# Altium PCB DB.PcbDoc (part 1 of 3)
Units mm, origin at the board's own origin, x right, y up, seen from the top; angles counter-clockwise.
Board outline 248 x 160 mm, 2 copper layers (Top Layer, Bottom Layer), stack 1.571 mm thick; 227 components, 245 nets, 960 pads, 72 vias.
Unrouted connection lines stored in the file: 1.
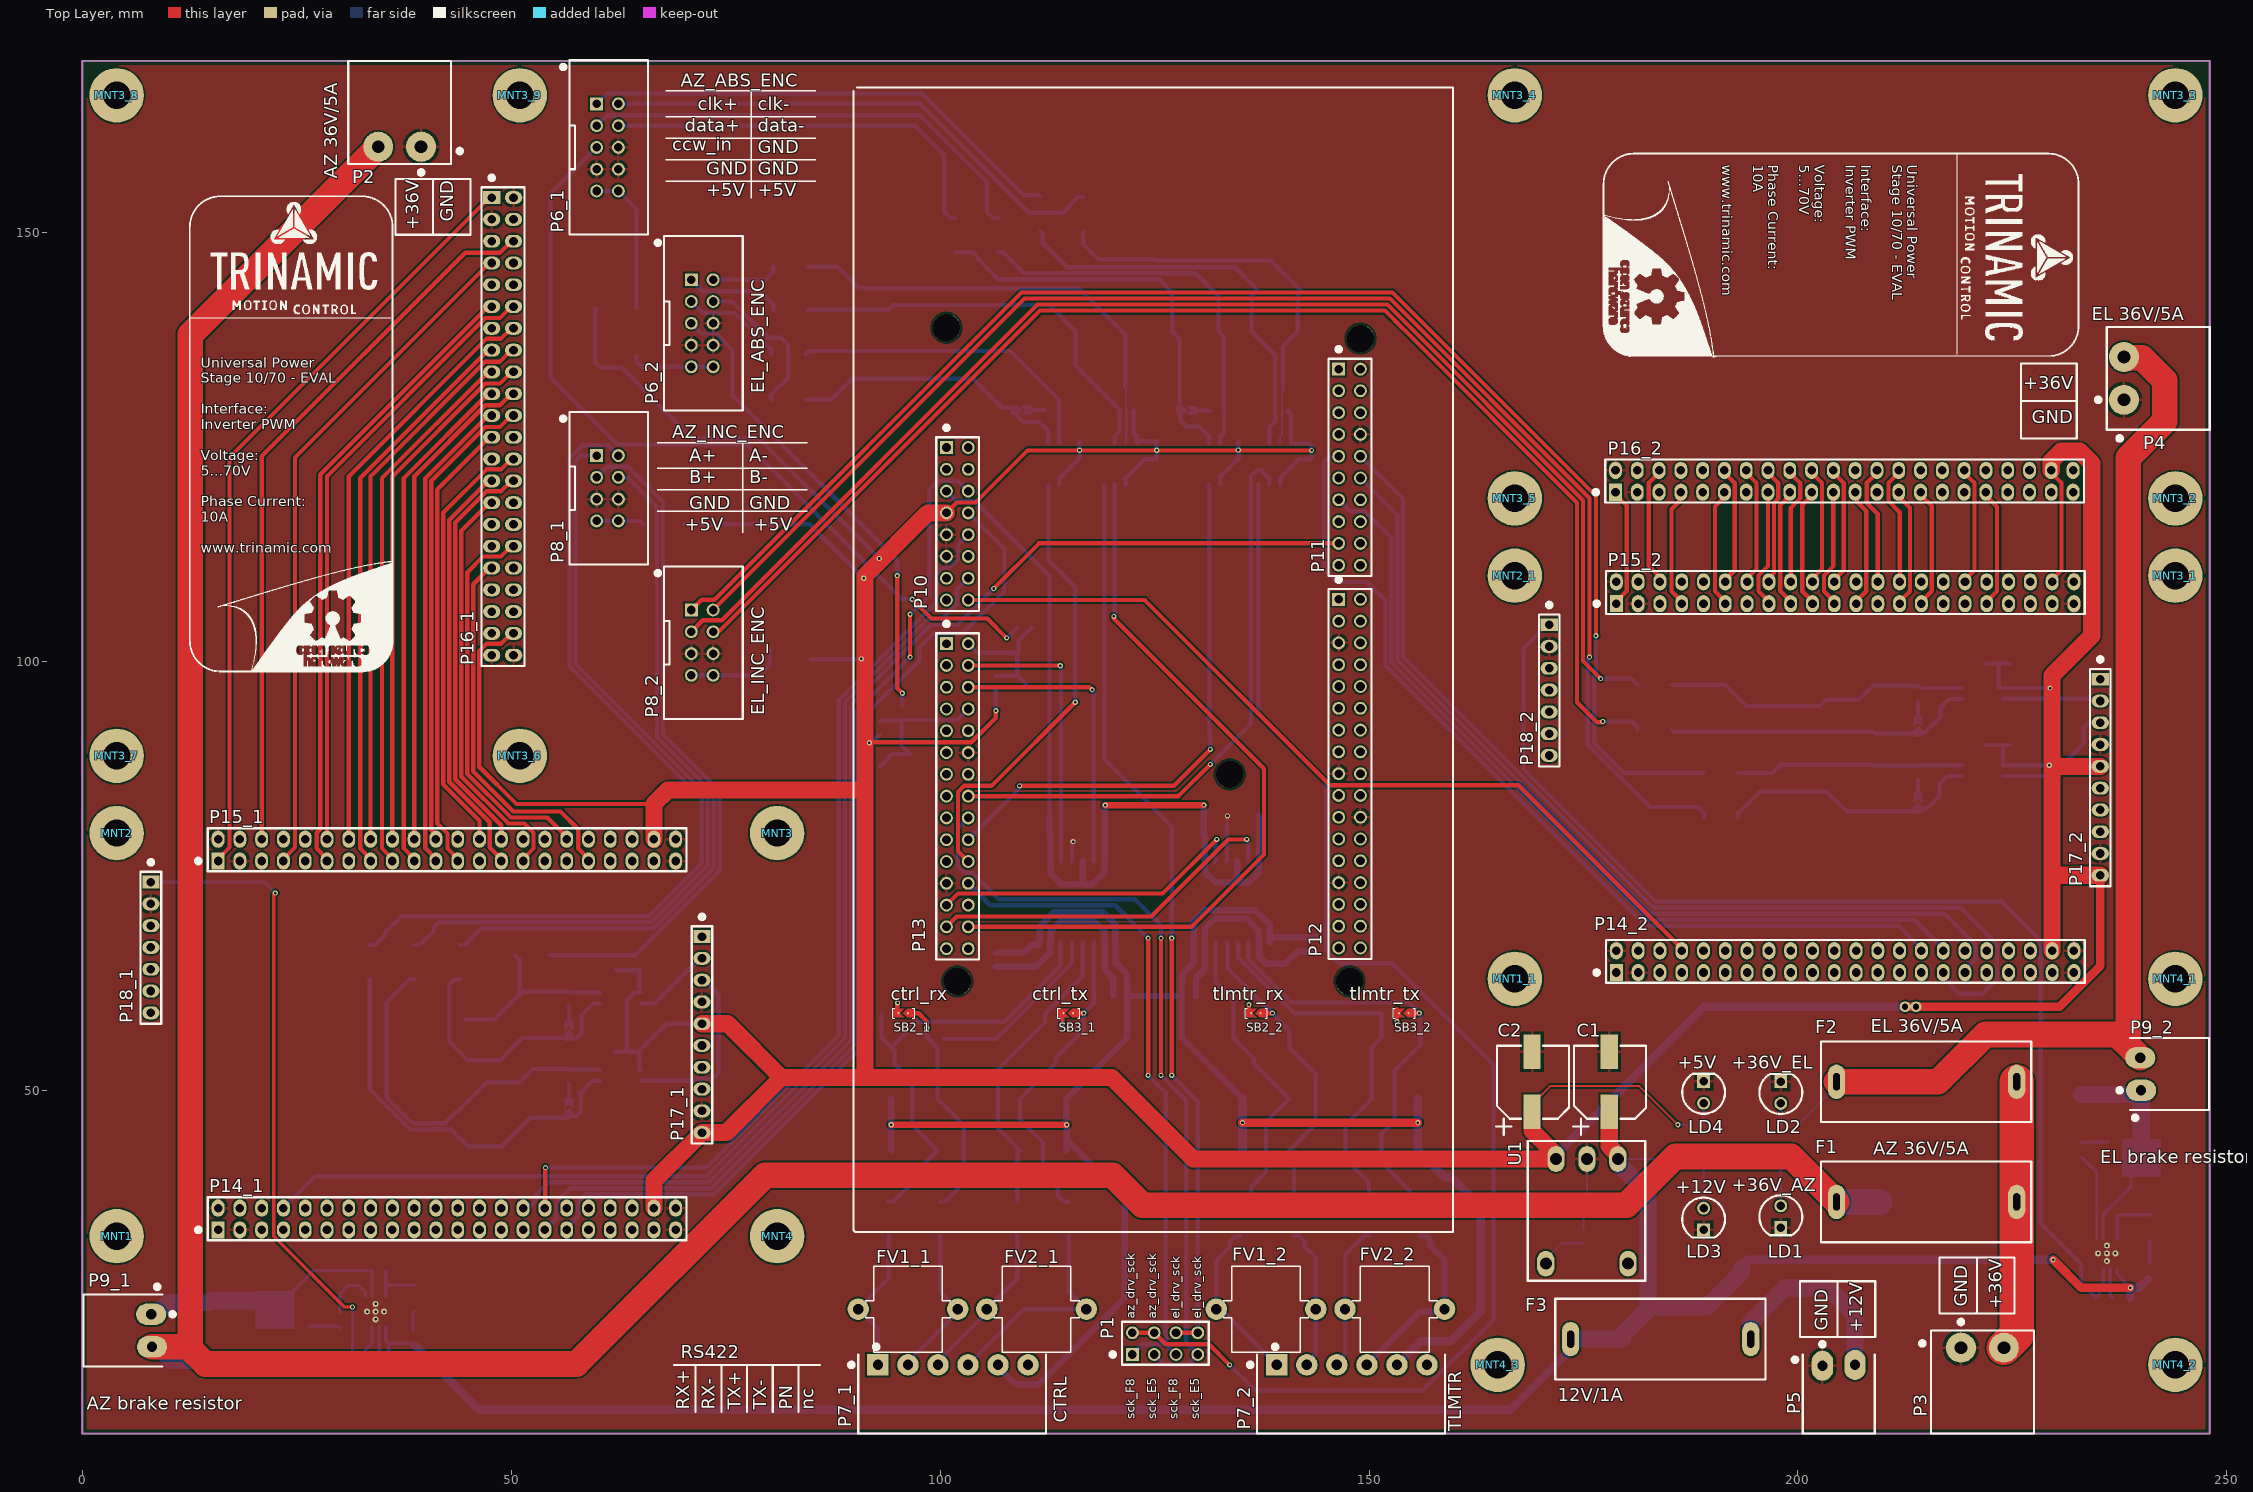
[diagram p0: Top Layer view]
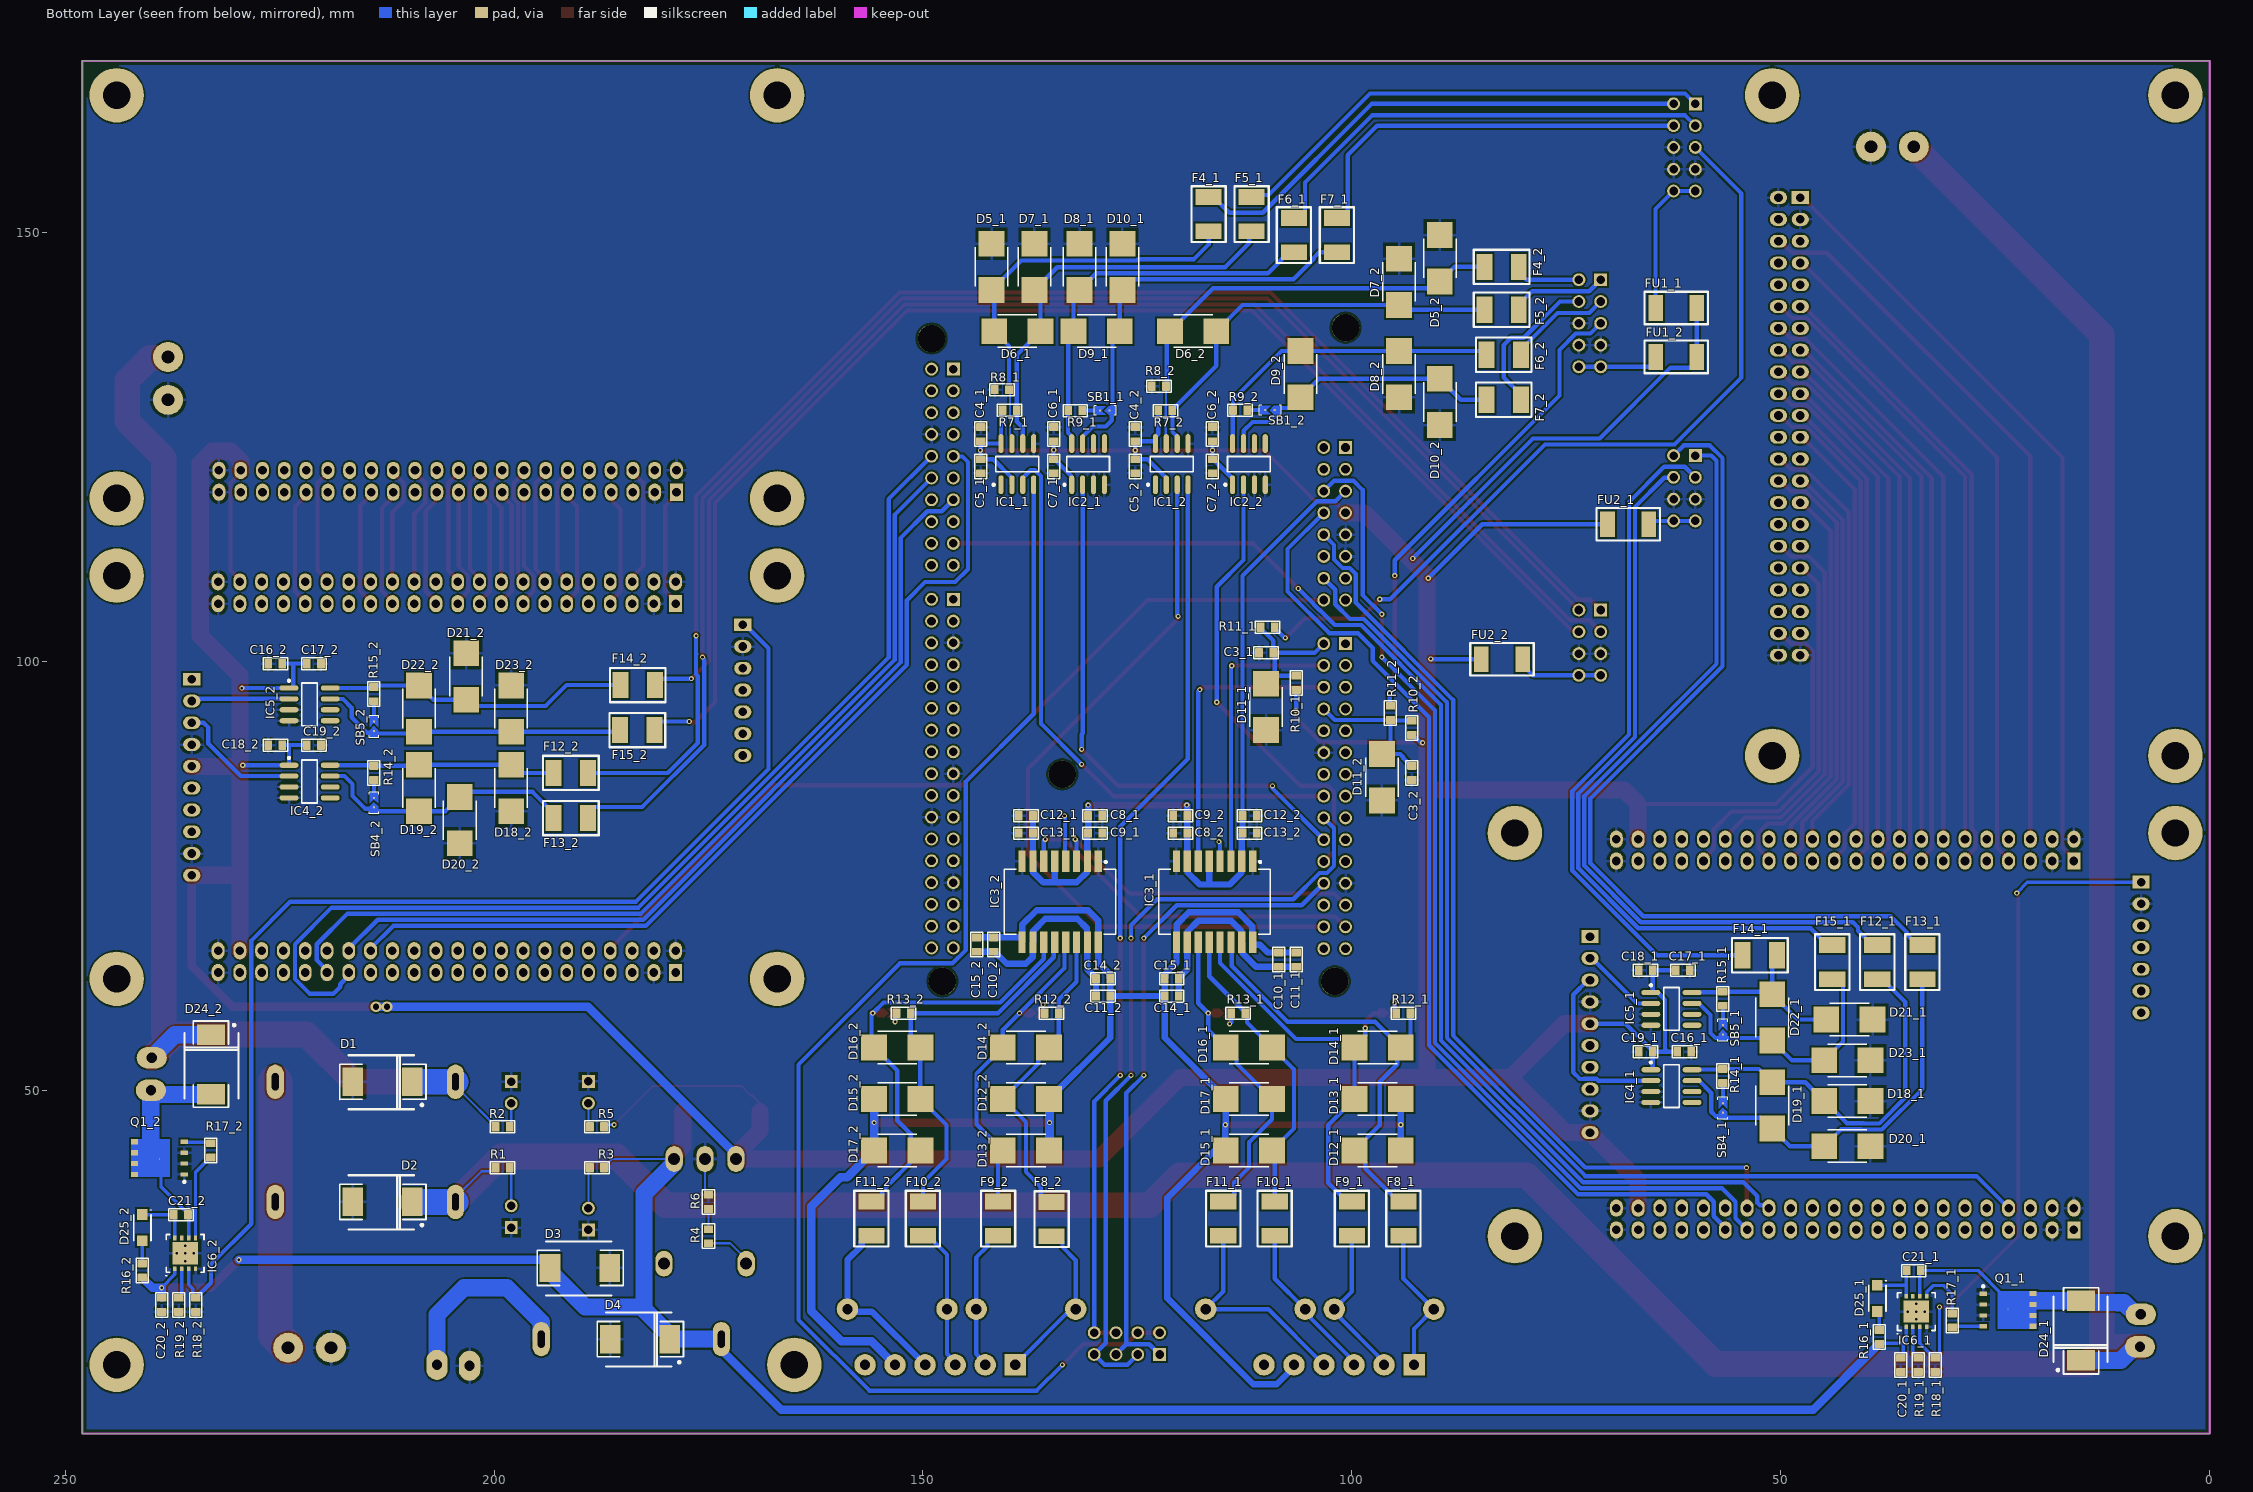
[diagram p1: Bottom Layer view, seen from below]

## Layer stack, top to bottom
Top Solder: solder mask 0.0102, Solder Resist, Dk 3.5
Top Layer: signal copper 0.0356
Dielectric 1: core 1.5, FR4 HiTg170, Dk 4.7
Bottom Layer: signal copper 0.0356
Bottom Solder: solder mask 0.0102, Solder Resist, Dk 3.5

## Board outline
0,10 0,170 248,170 248,10

## Design rules (kind name [scope] priority, off if disabled: settings)
AcuteAngle [All] p1: minimum=3.50000000000000E+0001 checktracksonly=FALSE
BoardOutlineClearance "BoardOutlineClearance 1" [All] p1: gap=0.25 ignorepadtopadclearanceinfootprint=FALSE except(0: Arc-SplitContinuation Track-SplitContinuation SMDPad-SplitContinuation THPad-SplitContinuation Via-SplitContinuation Fill-SplitContinuation Poly-SplitContinuation Region-SplitContinuation Text-SplitContinuation) // Milling
BoardOutlineClearance "BoardOutlineClearance 2" [All] p2: gap=0.4 ignorepadtopadclearanceinfootprint=FALSE except(0: Arc-SplitContinuation Track-SplitContinuation SMDPad-SplitContinuation THPad-SplitContinuation Via-SplitContinuation Fill-SplitContinuation Poly-SplitContinuation Region-SplitContinuation Text-SplitContinuation) // V-Cut
Clearance "Clearance 3 Oz" [All] p1 off: gap=0.35 ignorepadtopadclearanceinfootprint=FALSE except(0.25: Arc-Hole Track-Hole SMDPad-Hole THPad-Hole Via-Hole Fill-Hole Poly-Hole Region-Hole Text-Hole)
Clearance "Clearance 2 Oz" [All] p2 off: gap=0.3 ignorepadtopadclearanceinfootprint=FALSE except(0.25: Arc-Hole Track-Hole SMDPad-Hole THPad-Hole Via-Hole Fill-Hole Poly-Hole Region-Hole Text-Hole)
Clearance "Clearance-1 1 Oz" [All] p3: gap=0.2 ignorepadtopadclearanceinfootprint=FALSE except(0.25: Arc-Hole Track-Hole SMDPad-Hole THPad-Hole Via-Hole Fill-Hole Poly-Hole Region-Hole Text-Hole) // Standart
Clearance "Clearance-2 1 Oz" [All] p4: gap=0.15 ignorepadtopadclearanceinfootprint=FALSE except(0.2: Arc-Fill Arc-Poly Track-Fill Track-Poly SMDPad-Fill SMDPad-Poly THPad-Fill THPad-Poly Via-Fill Via-Poly Fill-Fill Fill-Poly Poly-Poly; 0.25: Arc-Hole Track-Hole SMDPad-Hole THPad-Hole Via-Hole Fill-Hole Poly-Hole Region-Hole Text-Hole) // Advance
Clearance "Clearance-1 1/2 Oz" [All] p5: gap=0.125 ignorepadtopadclearanceinfootprint=FALSE except(0.2: Arc-Fill Arc-Poly Track-Fill Track-Poly SMDPad-SMDPad SMDPad-Fill SMDPad-Poly THPad-Fill THPad-Poly Via-Fill Via-Poly Fill-Fill Fill-Poly Poly-Poly Poly-Region Poly-Text; 0.25: Arc-Hole Track-Hole SMDPad-Hole THPad-Hole Via-Hole Fill-Hole Poly-Hole Region-Hole Text-Hole) // Standart
Clearance "Clearance-2 1/2 Oz" [All] p6: gap=0.1 ignorepadtopadclearanceinfootprint=FALSE except(0.15: Arc-Fill Arc-Poly Track-Fill Track-Poly SMDPad-SMDPad SMDPad-Fill SMDPad-Poly THPad-Fill THPad-Poly Via-Fill Via-Poly Fill-Fill Fill-Poly Poly-Poly Poly-Region Poly-Text; 0.25: Arc-Hole Track-Hole SMDPad-Hole THPad-Hole Via-Hole Fill-Hole Poly-Hole Region-Hole Text-Hole) // Advance
DiffPairsRouting "DiffPairsRouting 1 Oz" [All] p1: maxlimit=0.254 minlimit=0.2 mostfreqgap=0.254 toplayer_minwidth=0.2 toplayer_maxwidth=0.381 toplayer_prefwidth=0.381 bottomlayer_minwidth=0.2 bottomlayer_maxwidth=0.381 bottomlayer_prefwidth=0.381 maxuncoupledlength=12.7
DiffPairsRouting "DiffPairsRouting 1/2 Oz" [All] p2 off: maxlimit=0.254 minlimit=0.1 mostfreqgap=0.254 toplayer_minwidth=0.1 toplayer_maxwidth=0.381 toplayer_prefwidth=0.381 bottomlayer_minwidth=0.1 bottomlayer_maxwidth=0.381 bottomlayer_prefwidth=0.381 maxuncoupledlength=12.7
HoleSize "Minimum HoleSize" [IsPad] p1 off: absolutevalues=TRUE maxlimit=5.9 minlimit=0.6 maxpercent=80.000 minpercent=20.000
HoleSize "Minimum HoleSize VIA 1" [IsVia] p2: absolutevalues=TRUE maxlimit=5.9 minlimit=0.3 maxpercent=80.000 minpercent=20.000 // Standart
HoleSize "Minimum HoleSize VIA 2" [IsVia] p3 off: absolutevalues=TRUE maxlimit=5.9 minlimit=0.2 maxpercent=80.000 minpercent=20.000 // Advance
HoleToHoleClearance Hole2HoleClearance [All] p1: gap=0.25 allowstackedmicrovias=FALSE
MinimumAnnularRing "Minimum AR VIA Standart" [IsVia] p1: minimumring=0.15
MinimumAnnularRing "Minimum AR PAD Standart" [IsPAD] p2: minimumring=0.2
MinimumAnnularRing "Minimum AR VIA Advance" [IsVia] p3 off: minimumring=0.1
MinimumAnnularRing "Minimum AR PAD Advance" [IsPAD] p4 off: minimumring=0.15
MinimumSolderMaskSliver "SolderMask Bridge Standart" [All] p1: minsoldermaskwidth=0.15 // All Masks
MinimumSolderMaskSliver "SolderMask Bridge Advance" [All] p2 off: minsoldermaskwidth=0.1 // Mask LDI
PlaneClearance "PlaneClearance 3 Oz" [All] p1 off: clearance=0.35
PlaneClearance "PlaneClearance 2 Oz" [All] p2 off: clearance=0.3
PlaneClearance "PlaneClearance 1 Oz" [All] p3: clearance=0.2
PlaneClearance "PlaneClearance-1 1/2 Oz" [All] p4 off: clearance=0.2 // Standart
PlaneClearance "PlaneClearance-2 1/2 Oz" [All] p5 off: clearance=0.15 // Advance
PlaneConnect "TermalConnect 3 Oz" [All] p1: planeconnectstyle=Relief reliefexpansion=0.2 reliefentries=4 reliefconductorwidth=0.35 reliefairgap=0.35 // Standart
PlaneConnect "TermalConnect 2 Oz" [All] p2 off: planeconnectstyle=Relief reliefexpansion=0.2 reliefentries=4 reliefconductorwidth=0.3 reliefairgap=0.3 // Standart
PlaneConnect "TermalConnect-1 1 Oz" [All] p3: planeconnectstyle=Relief reliefexpansion=0.2 reliefentries=4 reliefconductorwidth=0.2 reliefairgap=0.2 // Standart
PlaneConnect "TermalConnect-2 1 Oz" [All] p4 off: pad.planeconnectstyle=Relief pad.reliefexpansion=0.15 pad.reliefentries=4 pad.reliefconductorwidth=0.2 pad.reliefairgap=0.2 via.planeconnectstyle=Direct via.reliefexpansion=0.15 via.reliefentries=4 via.reliefconductorwidth=0.15 via.reliefairgap=0.15 // Advance
PlaneConnect "TermalConnect-1 1/2 Oz" [All] p5 off: planeconnectstyle=Relief reliefexpansion=0.2 reliefentries=4 reliefconductorwidth=0.2 reliefairgap=0.2 // Standart
PlaneConnect "TermalConnect-2 1/2 Oz" [All] p6 off: pad.planeconnectstyle=Relief pad.reliefexpansion=0.15 pad.reliefentries=4 pad.reliefconductorwidth=0.15 pad.reliefairgap=0.15 via.planeconnectstyle=Direct via.reliefexpansion=0.15 via.reliefentries=4 via.reliefconductorwidth=0.15 via.reliefairgap=0.15 // Advance
PolygonConnect "PolygonConnect 3 Oz" [All] p1: thpad.connectstyle=Relief thpad.reliefconductorwidth=0.35 thpad.reliefentries=4 thpad.polygonreliefangle="90 Angle" thpad.airgapwidth=0.35 smdpad.connectstyle=Relief smdpad.reliefconductorwidth=0.35 smdpad.reliefentries=4 smdpad.polygonreliefangle="90 Angle" smdpad.airgapwidth=0.35 via.connectstyle=Direct via.reliefconductorwidth=0.254 via.reliefentries=4 via.polygonreliefangle="90 Angle" via.airgapwidth=0.254
PolygonConnect "PolygonConnect 2 Oz" [All] p2 off: thpad.connectstyle=Relief thpad.reliefconductorwidth=0.3 thpad.reliefentries=4 thpad.polygonreliefangle="90 Angle" thpad.airgapwidth=0.3 smdpad.connectstyle=Relief smdpad.reliefconductorwidth=0.3 smdpad.reliefentries=4 smdpad.polygonreliefangle="90 Angle" smdpad.airgapwidth=0.3 via.connectstyle=Direct via.reliefconductorwidth=0.254 via.reliefentries=4 via.polygonreliefangle="90 Angle" via.airgapwidth=0.254
PolygonConnect "PolygonConnect-1 1 Oz" [All] p3: thpad.connectstyle=Relief thpad.reliefconductorwidth=0.2 thpad.reliefentries=4 thpad.polygonreliefangle="90 Angle" thpad.airgapwidth=0.2 smdpad.connectstyle=Relief smdpad.reliefconductorwidth=0.2 smdpad.reliefentries=4 smdpad.polygonreliefangle="90 Angle" smdpad.airgapwidth=0.2 via.connectstyle=Direct via.reliefconductorwidth=0.254 via.reliefentries=4 via.polygonreliefangle="90 Angle" via.airgapwidth=0.254 // Standart
PolygonConnect "PolygonConnect-2 1 Oz" [All] p4 off: thpad.connectstyle=Relief thpad.reliefconductorwidth=0.15 thpad.reliefentries=4 thpad.polygonreliefangle="90 Angle" thpad.airgapwidth=0.15 smdpad.connectstyle=Relief smdpad.reliefconductorwidth=0.15 smdpad.reliefentries=4 smdpad.polygonreliefangle="90 Angle" smdpad.airgapwidth=0.15 via.connectstyle=Direct via.reliefconductorwidth=0.254 via.reliefentries=4 via.polygonreliefangle="90 Angle" via.airgapwidth=0.254 // Advance
PolygonConnect "PolygonConnect-1 1/2 Oz" [All] p5 off: thpad.connectstyle=Relief thpad.reliefconductorwidth=0.15 thpad.reliefentries=4 thpad.polygonreliefangle="90 Angle" thpad.airgapwidth=0.2 smdpad.connectstyle=Relief smdpad.reliefconductorwidth=0.2 smdpad.reliefentries=4 smdpad.polygonreliefangle="90 Angle" smdpad.airgapwidth=0.2 via.connectstyle=Direct via.reliefconductorwidth=0.254 via.reliefentries=4 via.polygonreliefangle="90 Angle" via.airgapwidth=0.254 // Standart
PolygonConnect "PolygonConnect-2 1/2 Oz" [All] p6 off: thpad.connectstyle=Relief thpad.reliefconductorwidth=0.125 thpad.reliefentries=4 thpad.polygonreliefangle="90 Angle" thpad.airgapwidth=0.15 smdpad.connectstyle=Relief smdpad.reliefconductorwidth=0.125 smdpad.reliefentries=4 smdpad.polygonreliefangle="90 Angle" smdpad.airgapwidth=0.15 via.connectstyle=Direct via.reliefconductorwidth=0.254 via.reliefentries=4 via.polygonreliefangle="90 Angle" via.airgapwidth=0.254 // Advance
RoutingCorners [All] p1 off: cornerstyle=45-Degree minsetback=2.54 maxsetback=2.54
RoutingVias [All] p1: holewidth=0.3 width=0.6 viastyle="Through Hole" minholewidth=0.2 minwidth=0.4 maxholewidth=5.9 maxwidth=6.4
SilkToSilkClearance Silk2SilkClearance [All] p1 off: silktosilkclearance=0.15
SilkToSolderMaskClearance Silk2SolderMaskClearance [IsPad] p1 off: minsilkscreentomaskgap=0.15 clearancetoexposedcopper=TRUE
SolderMaskExpansion SolderMaskExpansion-1 [All] p1: expansion=0.05 istentingtop=FALSE // Standart
SolderMaskExpansion "SolderMaskExpansion LDI" [All] p2 off: expansion=0.025 istentingtop=FALSE // Advance
UnRoutedNet [All] p1: checkbadconnections=TRUE
Width "Width 3 Oz" [All] p1 off: maxlimit=10 minlimit=0.35 preferedwidth=0.4 checkconnectedcopper=TRUE
Width "Width 2 Oz" [All] p2 off: maxlimit=10 minlimit=0.3 preferedwidth=0.35 minimp=50.000000 maximp=50.000000 favimp=50.000000 checkconnectedcopper=TRUE
Width "Width 1 Oz" [All] p3: maxlimit=10 minlimit=0.15 preferedwidth=0.2 checkconnectedcopper=TRUE
Width "Width 1/2 Oz" [All] p4 off: maxlimit=10 minlimit=0.1 preferedwidth=0.125 checkconnectedcopper=TRUE
20 further rules are at their usual default settings.

## Classes and differential pairs
channel class trinamic_board: 1 2
channel class RS422_driver: 1 2
channel class INC_enc_driver: 1 2
channel class Brake: 1 2
channel class abs_enc_driver: 1 2
component class POWER: C1 C2 D1 D2 D3 D4 F1 F2 F3 LD1 LD2 LD3 LD4 P2 P3 P4 P5 R1 R2 R3 R4 R5 R6 U1
component class NUCLEA: P10 P11 P12 P13
component class debug_board: P1
component class 2: C8_2 C9_2 C10_2 C11_2 C12_2 C13_2 C14_2 C15_2 D12_2 D13_2 D14_2 D15_2 D16_2 D17_2 F8_2 F9_2 F10_2 F11_2 FV1_2 FV2_2 IC3_2 P7_2 R12_2 R13_2 SB2_2 SB3_2
component class 1: C8_1 C9_1 C10_1 C11_1 C12_1 C13_1 C14_1 C15_1 D12_1 D13_1 D14_1 D15_1 D16_1 D17_1 F8_1 F9_1 F10_1 F11_1 FV1_1 FV2_1 IC3_1 P7_1 R12_1 R13_1 SB2_1 SB3_1

## Components (designator, comment, footprint, x,y, rotation, side; value= is the part's Value field where it differs from the comment)
C1 "220uF" "ECAP SMD 8x10.5" 178,51 r90 top
C2 "220uF" "ECAP SMD 8x10.5" 169,51 r90 top
C3_1 "0.1uF" C1608-0603 110,101 r180 bottom (schematic designator C3)
C3_2 "0.1uF" C1608-0603 93,87 r90 bottom (schematic designator C3)
C4_1 "4.7uF" C1608-0603 143.25,126.5 r270 bottom (schematic designator C4)
C4_2 "4.7uF" C1608-0603 125.25,126.5 r270 bottom (schematic designator C4)
C5_1 "0.1uF" C1608-0603 143.25,122.75 r90 bottom (schematic designator C5)
C5_2 "0.1uF" C1608-0603 125.25,122.75 r90 bottom (schematic designator C5)
C6_1 "4.7uF" C1608-0603 134.75,126.5 r270 bottom (schematic designator C6)
C6_2 "4.7uF" C1608-0603 116.25,126.5 r270 bottom (schematic designator C6)
C7_1 "0.1uF" C1608-0603 134.75,122.75 r90 bottom (schematic designator C7)
C7_2 "0.1uF" C1608-0603 116.25,122.75 r90 bottom (schematic designator C7)
C8_1 "4.7uF" C1608-0603 129.925,82 r180 bottom (schematic designator C8)
C8_2 "4.7uF" C1608-0603 120,80 r0 bottom (schematic designator C8)
C9_1 "0.1uF" C1608-0603 129.925,80 r180 bottom (schematic designator C9)
C9_2 "0.1uF" C1608-0603 120,82 r0 bottom (schematic designator C9)
C10_1 "4.7uF" C1608-0603 108.5,65.25 r90 bottom (schematic designator C10)
C10_2 "4.7uF" C1608-0603 141.75,67 r90 bottom (schematic designator C10)
C11_1 "0.1uF" C1608-0603 106.5,65.25 r90 bottom (schematic designator C11)
C11_2 "0.1uF" C1608-0603 129,61 r180 bottom (schematic designator C11)
C12_1 "4.7uF" C1608-0603 138,82 r180 bottom (schematic designator C12)
C12_2 "4.7uF" C1608-0603 111.925,82 r0 bottom (schematic designator C12)
C13_1 "0.1uF" C1608-0603 138,80 r180 bottom (schematic designator C13)
C13_2 "0.1uF" C1608-0603 111.925,80 r0 bottom (schematic designator C13)
C14_1 "4.7uF" C1608-0603 121,61 r180 bottom (schematic designator C14)
C14_2 "4.7uF" C1608-0603 129,63 r0 bottom (schematic designator C14)
C15_1 "0.1uF" C1608-0603 121,63 r180 bottom (schematic designator C15)
C15_2 "0.1uF" C1608-0603 143.75,67 r270 bottom (schematic designator C15)
C16_1 "4.7uF" C1608-0603 61.25,54.5 r0 bottom (schematic designator C16)
C16_2 "4.7uF" C1608-0603 225.5,99.75 r180 bottom (schematic designator C16)
C17_1 "0.1uF" C1608-0603 61.425,64 r0 bottom (schematic designator C17)
C17_2 "0.1uF" C1608-0603 221,99.75 r0 bottom (schematic designator C17)
C18_1 "4.7uF" C1608-0603 65.75,64 r180 bottom (schematic designator C18)
C18_2 "4.7uF" C1608-0603 225.5,90.25 r180 bottom (schematic designator C18)
C19_1 "0.1uF" C1608-0603 65.75,54.5 r180 bottom (schematic designator C19)
C19_2 "0.1uF" C1608-0603 221,90.25 r0 bottom (schematic designator C19)
C20_1 "1uF" C1608-0603 36,18 r270 bottom (schematic designator C20)
C20_2 "1uF" C1608-0603 238.75,25 r270 bottom (schematic designator C20)
C21_1 "10uF" C1608-0603 34.5,29 r180 bottom (schematic designator C21)
C21_2 "10uF" C1608-0603 236.5,35.5 r180 bottom (schematic designator C21)
D1 "STPS5L60S" SMCJ 213,51 r0 bottom
D2 "STPS5L60S" SMCJ 213,37 r0 bottom
D3 "SMCJ15CA" SMCJ_CA 190,29.3 r0 bottom
D4 "STPS5L60S" SMCJ 183,21 r0 bottom
D5_1 "SMBJ5.0CA" SMB_H 142,146 r270 bottom (schematic designator D5)
D5_2 "SMBJ5.0CA" SMB_H 89.75,147 r270 bottom (schematic designator D5)
D6_1 "SMBJ5.0CA" SMB_H 139,138.5 r0 bottom (schematic designator D6)
D6_2 "SMBJ5.0CA" SMB_H 118.5,138.5 r0 bottom (schematic designator D6)
D7_1 "SMBJ5.0CA" SMB_H 137,146 r270 bottom (schematic designator D7)
D7_2 "SMBJ5.0CA" SMB_H 94.5,144.25 r270 bottom (schematic designator D7)
D8_1 "SMBJ5.0CA" SMB_H 131.75,146 r270 bottom (schematic designator D8)
D8_2 "SMBJ5.0CA" SMB_H 94.5,133.5 r90 bottom (schematic designator D8)
D9_1 "SMBJ5.0CA" SMB_H 129.75,138.5 r0 bottom (schematic designator D9)
D9_2 "SMBJ5.0CA" SMB_H 106,133.5 r90 bottom (schematic designator D9)
D10_1 "SMBJ5.0CA" SMB_H 126.75,146 r270 bottom (schematic designator D10)
D10_2 "SMBJ5.0CA" SMB_H 89.75,130.25 r90 bottom (schematic designator D10)
D11_1 "SMBJ5.0CA" SMB_H 110,94.7 r90 bottom (schematic designator D11)
D11_2 "SMBJ5.0CA" SMB_H 96.5,86.5 r90 bottom (schematic designator D11)
D12_1 "SMBJ5.0CA" SMB_H 97,43 r0 bottom (schematic designator D12)
D12_2 "SMBJ5.0CA" SMB_H 138,49 r0 bottom (schematic designator D12)
D13_1 "SMBJ5.0CA" SMB_H 97,49 r0 bottom (schematic designator D13)
D13_2 "SMBJ5.0CA" SMB_H 138,43 r0 bottom (schematic designator D13)
D14_1 "SMBJ5.0CA" SMB_H 97,55 r0 bottom (schematic designator D14)
D14_2 "SMBJ5.0CA" SMB_H 138,55 r0 bottom (schematic designator D14)
D15_1 "SMBJ5.0CA" SMB_H 112,43 r180 bottom (schematic designator D15)
D15_2 "SMBJ5.0CA" SMB_H 153,49 r180 bottom (schematic designator D15)
D16_1 "SMBJ5.0CA" SMB_H 112,55 r180 bottom (schematic designator D16)
D16_2 "SMBJ5.0CA" SMB_H 153,55 r180 bottom (schematic designator D16)
D17_1 "SMBJ5.0CA" SMB_H 112,49 r180 bottom (schematic designator D17)
D17_2 "SMBJ5.0CA" SMB_H 153,43 r180 bottom (schematic designator D17)
D18_1 "SMBJ5.0CA" SMB_H 42.25,48.75 r0 bottom (schematic designator D18)
D18_2 "SMBJ5.0CA" SMB_H 198,85.25 r90 bottom (schematic designator D18)
D19_1 "SMBJ5.0CA" SMB_H 51,48.25 r90 bottom (schematic designator D19)
D19_2 "SMBJ5.0CA" SMB_H 208.75,85.25 r90 bottom (schematic designator D19)
D20_1 "SMBJ5.0CA" SMB_H 42.25,43.5 r0 bottom (schematic designator D20)
D20_2 "SMBJ5.0CA" SMB_H 204,81.5 r90 bottom (schematic designator D20)
D21_1 "SMBJ5.0CA" SMB_H 42,58.25 r0 bottom (schematic designator D21)
D21_2 "SMBJ5.0CA" SMB_H 203.25,98.25 r270 bottom (schematic designator D21)
D22_1 "SMBJ5.0CA" SMB_H 51,58.5 r90 bottom (schematic designator D22)
D22_2 "SMBJ5.0CA" SMB_H 208.75,94.5 r90 bottom (schematic designator D22)
D23_1 "SMBJ5.0CA" SMB_H 42.25,53.5 r0 bottom (schematic designator D23)
D23_2 "SMBJ5.0CA" SMB_H 198,94.5 r270 bottom (schematic designator D23)
D24_1 "STPS5L60S" SMCJ 15,22 r90 bottom (schematic designator D24)
D24_2 "STPS5L60S" SMCJ 233,53 r270 bottom (schematic designator D24)
D25_1 "SKL110" SODFL370X140-2N 38.75,25.75 r270 bottom (schematic designator D25)
D25_2 "SKL110" SODFL370X140-2N 241,34 r270 bottom (schematic designator D25)
F1 "FH-101C" FH-101C 215,37 r180 top
F2 "FH-101C" FH-101C 215,51 r180 top
F3 "FH-101C" FH-101C 184,21 r180 top
F4_1 "TBU-CA065-200-WH" TBU_CA 116.7,152.2 r90 bottom (schematic designator F4)
F4_2 "TBU-CA065-200-WH" TBU_CA 82.5,146 r180 bottom (schematic designator F4)
F5_1 "TBU-CA065-200-WH" TBU_CA 111.7,152.2 r90 bottom (schematic designator F5)
F5_2 "TBU-CA065-200-WH" TBU_CA 82.5,141 r180 bottom (schematic designator F5)
F6_1 "TBU-CA065-200-WH" TBU_CA 106.75,149.75 r90 bottom (schematic designator F6)
F6_2 "TBU-CA065-200-WH" TBU_CA 82.25,135.75 r180 bottom (schematic designator F6)
F7_1 "TBU-CA065-200-WH" TBU_CA 101.75,149.75 r90 bottom (schematic designator F7)
F7_2 "TBU-CA065-200-WH" TBU_CA 82.25,130.5 r180 bottom (schematic designator F7)
F8_1 "TBU-CA065-200-WH" TBU_CA 94,35 r270 bottom (schematic designator F8)
F8_2 "TBU-CA065-200-WH" TBU_CA 135,34.95 r270 bottom (schematic designator F8)
F9_1 "TBU-CA065-200-WH" TBU_CA 100,35 r270 bottom (schematic designator F9)
F9_2 "TBU-CA065-200-WH" TBU_CA 141.25,35 r270 bottom (schematic designator F9)
F10_1 "TBU-CA065-200-WH" TBU_CA 109,35 r270 bottom (schematic designator F10)
F10_2 "TBU-CA065-200-WH" TBU_CA 150,35 r270 bottom (schematic designator F10)
F11_1 "TBU-CA065-200-WH" TBU_CA 115,35 r270 bottom (schematic designator F11)
F11_2 "TBU-CA065-200-WH" TBU_CA 156,35 r270 bottom (schematic designator F11)
F12_1 "TBU-CA065-200-WH" TBU_CA 38.75,65 r90 bottom (schematic designator F12)
F12_2 "TBU-CA065-200-WH" TBU_CA 191,87 r180 bottom (schematic designator F12)
F13_1 "TBU-CA065-200-WH" TBU_CA 33.5,65 r90 bottom (schematic designator F13)
F13_2 "TBU-CA065-200-WH" TBU_CA 191,81.75 r180 bottom (schematic designator F13)
F14_1 "TBU-CA065-200-WH" TBU_CA 52.5,65.75 r0 bottom (schematic designator F14)
F14_2 "TBU-CA065-200-WH" TBU_CA 183.2,97.25 r180 bottom (schematic designator F14)
F15_1 "TBU-CA065-200-WH" TBU_CA 44,65 r90 bottom (schematic designator F15)
F15_2 "TBU-CA065-200-WH" TBU_CA 183.25,92 r180 bottom (schematic designator F15)
FU1_1 "MF-MSMF030" MF-MSMF 62.2,141.2 r180 bottom (schematic designator FU1)
FU1_2 "MF-MSMF030" MF-MSMF 62.2,135.5 r180 bottom (schematic designator FU1)
FU2_1 "MF-MSMF030" MF-MSMF 67.8,116 r0 bottom (schematic designator FU2)
FU2_2 "MF-MSMF030" MF-MSMF 82.5,100.25 r0 bottom (schematic designator FU2)
FV1_1 "NS2R-75A1-M" NS2R-xxx-x 96.25,24.5 r0 top (schematic designator FV1)
FV1_2 "NS2R-75A1-M" NS2R-xxx-x 138,24.5 r0 top (schematic designator FV1)
FV2_1 "NS2R-75A1-M" NS2R-xxx-x 111.25,24.5 r180 top (schematic designator FV2)
FV2_2 "NS2R-75A1-M" NS2R-xxx-x 153,24.5 r180 top (schematic designator FV2)
IC1_1 "ADM4852arz" SO8_N 139,123 r90 bottom (schematic designator IC1)
IC1_2 "ADM4852arz" SO8_N 121,123 r90 bottom (schematic designator IC1)
IC2_1 "ADM4857arz" SO8_N 130.75,123 r90 bottom (schematic designator IC2)
IC2_2 "ADM4857arz" SO8_N 112,123 r90 bottom (schematic designator IC2)
IC3_1 "ADM2687E" SO16_WIDE(300mil)_13x10_H 116,72 r270 bottom (schematic designator IC3)
IC3_2 "ADM2687E" SO16_WIDE(300mil)_13x10_H 134,72 r270 bottom (schematic designator IC3)
IC4_1 "ADM4857arz" SO8_N 62.75,50.5 r180 bottom (schematic designator IC4)
IC4_2 "ADM4857arz" SO8_N 221.5,86 r180 bottom (schematic designator IC4)
IC5_1 "ADM4857arz" SO8_N 62.75,59.5 r180 bottom (schematic designator IC5)
IC5_2 "ADM4857arz" SO8_N 221.5,95 r180 bottom (schematic designator IC5)
IC6_1 "LM5109BSD/NOPB" PSON80P400X80_HS-9N 34.2,24.215 r90 bottom (schematic designator IC6)
IC6_2 "LM5109BSD/NOPB" PSON80P400X80_HS-9N 236,31 r90 bottom (schematic designator IC6)
LD1 "GNL-3012ED" "LED 3mm" 198,35.27 r90 top
LD2 "GNL-3012ED" "LED 3mm" 198,49.75 r270 top
LD3 "GNL-3012ED" "LED 3mm" 189,35 r90 top
LD4 "GNL-3012ED" "LED 3mm" 189,49.77 r270 top
MNT1 "MOUNTING_HOLE" MNT_HOLE_6.35-3.2 4,33 r90 top locked
MNT1_1 "MOUNTING_HOLE" MNT_HOLE_6.35-3.2 167,63 r90 top locked
MNT2 "MOUNTING_HOLE" MNT_HOLE_6.35-3.2 4,80 r90 top locked
MNT2_1 "MOUNTING_HOLE" MNT_HOLE_6.35-3.2 167,110 r90 top locked
MNT3 "MOUNTING_HOLE" MNT_HOLE_6.35-3.2 81,80 r90 top locked
MNT3_1 "MOUNTING_HOLE" MNT_HOLE_6.35-3.2 244,110 r90 top locked
MNT3_2 "MOUNTING_HOLE" MNT_HOLE_6.35-3.2 244,119 r90 top locked
MNT3_3 "MOUNTING_HOLE" MNT_HOLE_6.35-3.2 244,166 r90 top locked
MNT3_4 "MOUNTING_HOLE" MNT_HOLE_6.35-3.2 167,166 r90 top locked
MNT3_5 "MOUNTING_HOLE" MNT_HOLE_6.35-3.2 167,119 r90 top locked
MNT3_6 "MOUNTING_HOLE" MNT_HOLE_6.35-3.2 51,89 r90 top locked
MNT3_7 "MOUNTING_HOLE" MNT_HOLE_6.35-3.2 4,89 r90 top locked
MNT3_8 "MOUNTING_HOLE" MNT_HOLE_6.35-3.2 4,166 r90 top locked
MNT3_9 "MOUNTING_HOLE" MNT_HOLE_6.35-3.2 51,166 r90 top locked
MNT4 "MOUNTING_HOLE" MNT_HOLE_6.35-3.2 81,33 r90 top locked
MNT4_1 "MOUNTING_HOLE" MNT_HOLE_6.35-3.2 244,63 r90 top locked
MNT4_2 "MOUNTING_HOLE" MNT_HOLE_6.35-3.2 244,18 r90 top locked
MNT4_3 "MOUNTING_HOLE" MNT_HOLE_6.35-3.2 165,18 r90 top locked
P1 "PLD-8" PLD-8 122.42,19.21 r180 top
P2 "2EDGR-5.0-02P" 2EDGR-5.0-02P 37,160 r0 top
P3 "2EDGR-5.0-02P" 2EDGR-5.0-02P 221.5,20 r180 top
P4 "2EDGR-5.0-02P" 2EDGR-5.0-02P 238,133 r270 top
P5 "15EDGRC-3.81-02" 15EDGRC-3.81-02 204.75,18 r180 top
P6_1 "BH-10" BH-10 59.96,165 r90 top (schematic designator P6)
P6_2 "BH-10" BH-10 71,144.5 r90 top (schematic designator P6)
P7_1 "15EDGRC-3.5-06P-14" 15EDGRC-3.5-06P-14 92.75,18 r180 top (schematic designator P7)
P7_2 "15EDGRC-3.5-06P-14" 15EDGRC-3.5-06P-14 139.25,18 r180 top (schematic designator P7)
P8_1 "BH-08" BH-08 59.96,124 r90 top (schematic designator P8)
P8_2 "BH-08" BH-08 71,106 r90 top (schematic designator P8)
P9_1 "15EDGRC-3.81-02" 15EDGRC-3.81-02 8.127,22 r90 top (schematic designator P9)
P9_2 "15EDGRC-3.81-02" 15EDGRC-3.81-02 239.9,51.9 r270 top (schematic designator P9)
P10 "PBD-16" PBD-16 100.74,124.94 r90 top locked
P11 "PBD-20" PBD-20 146.46,134.084 r90 top locked
P12 "PBD-34" PBD-34 146.46,107.24 r90 top locked
P13 "PBD-30" PBD-30 100.74,102.08 r90 top locked
P14_1 "PLD-44" PLD-44 15.83,33.737 r180 top locked (schematic designator P14)
P14_2 "PLD-44" PLD-44 178.83,63.737 r180 top locked (schematic designator P14)
P15_1 "PLD-44" PLD-44 15.83,76.737 r180 top locked (schematic designator P15)
P15_2 "PLD-44" PLD-44 178.83,106.737 r180 top locked (schematic designator P15)
P16_1 "PLD-44" PLD-44 47.73,154.07 r90 top locked (schematic designator P16)
P16_2 "PLD-44" PLD-44 178.73,119.73 r180 top locked (schematic designator P16)
P17_1 "PBS-10" PBS-10 72.24,67.93 r90 top locked (schematic designator P17)
P17_2 "PBS-10" PBS-10 235.24,97.93 r90 top locked (schematic designator P17)
P18_1 "PBS-7" PBS-7 8,74.28 r90 top locked (schematic designator P18)
P18_2 "PBS-7" PBS-7 171,104.28 r90 top locked (schematic designator P18)
Q1_1 "BSC030N08NS5ATMA1" PG-TDSON-8 23.5,24.4 r270 bottom (schematic designator Q1)
Q1_2 "BSC030N08NS5ATMA1" PG-TDSON-8 239,42.1 r90 bottom (schematic designator Q1)
R1 "7.2к" R1608-0603 199,41 r0 bottom
R2 "7.2к" R1608-0603 199,45.75 r0 bottom
R3 "2.4к" R1608-0603 188,41 r180 bottom
R4 "330" R1608-0603 175,33 r90 bottom
R5 "1к" R1608-0603 188,45.75 r180 bottom
R6 "18" R1608-0603 175,37 r270 bottom
R7_1 "60R" R1608-0603 139.9,129.3 r180 bottom (schematic designator R7)
R7_2 "60R" R1608-0603 121.75,129.25 r180 bottom (schematic designator R7)
R8_1 "60R" R1608-0603 140.8,131.7 r180 bottom (schematic designator R8)
R8_2 "60R" R1608-0603 122.5,132.1 r180 bottom (schematic designator R8)
R9_1 "120R" R1608-0603 132.25,129.25 r0 bottom (schematic designator R9)
R9_2 "120R" R1608-0603 113.025,129.3 r0 bottom (schematic designator R9)
R10_1 "10k" R1608-0603 106.5,97.5 r90 bottom (schematic designator R10)
R10_2 "10k" R1608-0603 93,92.25 r90 bottom (schematic designator R10)
R11_1 "1k" R1608-0603 109.825,104 r180 bottom (schematic designator R11)
R11_2 "1k" R1608-0603 95.5,94 r90 bottom (schematic designator R11)
R12_1 "120R" R1608-0603 94,59 r180 bottom (schematic designator R12)
R12_2 "120R" R1608-0603 135,59 r180 bottom (schematic designator R12)
R13_1 "120R" R1608-0603 113.25,59 r180 bottom (schematic designator R13)
R13_2 "120R" R1608-0603 152.25,59 r180 bottom (schematic designator R13)
R14_1 "120R" R1608-0603 56.75,51.675 r90 bottom (schematic designator R14)
R14_2 "120R" R1608-0603 214,87 r90 bottom (schematic designator R14)
R15_1 "120R" R1608-0603 56.75,60.675 r90 bottom (schematic designator R15)
R15_2 "120R" R1608-0603 214,96.2 r90 bottom (schematic designator R15)
R16_1 "2.2R" R1608-0603 38.5,21.25 r90 bottom (schematic designator R16)
R16_2 "2.2R" R1608-0603 241,29 r90 bottom (schematic designator R16)
R17_1 "2.2R" R1608-0603 30,23.175 r270 bottom (schematic designator R17)
R17_2 "2.2R" R1608-0603 233,43 r90 bottom (schematic designator R17)
R18_1 "10k" R1608-0603 32,18 r90 bottom (schematic designator R18)
R18_2 "10k" R1608-0603 234.75,25 r90 bottom (schematic designator R18)
R19_1 "10k" R1608-0603 34,18 r90 bottom (schematic designator R19)
R19_2 "10k" R1608-0603 236.75,25 r90 bottom (schematic designator R19)
SB1_1 "" SOLDER-BRIDGE_R0603-0R 128.75,129.25 r0 bottom (schematic designator SB1)
SB1_2 "" SOLDER-BRIDGE_R0603-0R 109.5,129.3 r0 bottom (schematic designator SB1)
SB2_1 "" SOLDER-BRIDGE_R0603-0R 95.75,59 r180 top (schematic designator SB2)
SB2_2 "" SOLDER-BRIDGE_R0603-0R 136.85,59 r180 top (schematic designator SB2)
SB3_1 "" SOLDER-BRIDGE_R0603-0R 115,59 r180 top (schematic designator SB3)
SB3_2 "" SOLDER-BRIDGE_R0603-0R 154.1,59 r180 top (schematic designator SB3)
SB4_1 "" SOLDER-BRIDGE_R0603-0R 56.75,47.9 r90 bottom (schematic designator SB4)
SB4_2 "" SOLDER-BRIDGE_R0603-0R 214,83.5 r90 bottom (schematic designator SB4)
SB5_1 "" SOLDER-BRIDGE_R0603-0R 56.75,57 r90 bottom (schematic designator SB5)
SB5_2 "" SOLDER-BRIDGE_R0603-0R 214,92.4 r90 bottom (schematic designator SB5)
U1 "PTH08080W" PTH08080W 179,42 r270 top

## Footprints (in the part's own frame and the unit in brackets; to place one, negate y for a bottom-side part, rotate by r counter-clockwise, add the part's x,y. Pads: shape width x height; smd on the part's side, far side on the other; paste and mask are expansions set on the pad)
2EDGR-5.0-02P [mm] "Разъем на плату"
  round 3.5 hole 1.5: 1(2.5,0) 2(-2.5,0)
  silkscreen extent -6,-3.25 7.25,10, body extent -6,-2 6,10, height 8.7
15EDGRC-3.5-06P-14 [mm] "Разъем на плату"
  rect 2.5x2.5 hole 1.2: 1(0,0)
  round 2.5 hole 1.2: 2(-3.5,0) 3(-7,0) 4(-10.5,0) 5(-14,0) 6(-17.5,0)
  silkscreen extent -19.6,-2.35 3.35,8, body extent -19.78,-1.3 2.38,7.9, height 7.29
15EDGRC-3.81-02 [mm] "Разъем на плату"
  oval 2.5x3.5 hole 1.2: 1(1.9,0.1) 2(-1.9,0)
  silkscreen extent -4.2,-2.65 5.35,8, body extent -4.3,-1.2 4.11,8, height 7.29
BH-08 [mm] "Разъем на плату"
  rect 1.5x1.5 hole 1: 1(0,0)
  round 1.5 hole 1: 2(0,-2.54) 3(-2.54,0) 4(-2.54,-2.54) 5(-5.08,0) 6(-5.08,-2.54) 7(-7.62,0) 8(-7.62,-2.54)
  silkscreen extent -12.7,-5.99 5.08,4.14, body extent -12.69,-5.92 5.07,3.18, height 8.8
BH-10 [mm] "Разъем на плату"
  rect 1.5x1.5 hole 1: 1(0,0)
  round 1.5 hole 1: 2(0,-2.54) 3(-2.54,0) 4(-2.54,-2.54) 5(-5.08,0) 6(-5.08,-2.54) 7(-7.62,0) 8(-7.62,-2.54) 9(-10.16,0) 10(-10.16,-2.54)
  silkscreen extent -15.24,-5.99 5.08,4.14, body extent -15.2,-6.05 5.1,3.05, height 8.8
C1608-0603 [mm] "Chip Resistor; Body 1.6 x 0.8 mm (LxW typ)"
  rrect15% 0.9x1.1 smd paste-0.05 mask+0.05: 1(-0.825,0) 2(0.825,0)
  silkscreen extent -1.43,-0.7 1.43,0.7, body extent -0.8,-0.4 0.8,0.4, height 0.3
"ECAP SMD 8x10.5" [mm]
  rect 4x2 smd: 1(-3.5,0) 2(3.5,0)
  silkscreen extent -6.2,-4.3 4.2,4.2, body extent -4.55,-4.28 4.55,4.08, height 10.2
FH-101C [mm]
  oval 2x4 hole 0.8 slot 2 at 90 deg: 1(-10.5,0) 2(10.5,0)
  silkscreen extent -12.2,-4.7 12.3,4.7, body extent -13.25,-4.9 13.25,4.9, height 13.5
"LED 3mm" [mm]
  rect 1.5x1.5 hole 1: 1(-1.27,0)
  round 1.5 hole 1: 2(1.27,0)
  silkscreen extent -2.17,-2.5 2.5,2.5, body extent -1.57,-1.81 1.87,2.03, height 3.89
MF-MSMF [mm]
  rect 1.7x3 smd: 1(-2.4,0) 2(2.4,0)
  silkscreen extent -3.7,-1.9 3.7,1.9, body extent -2.36,-1.71 2.36,1.71, height 0.85
MNT_HOLE_6.35-3.2 [mm]
  round 6.35 hole 3.2: 1(0,0)
  silkscreen extent -3.3,-3.3 3.3,3.3
NS2R-xxx-x [mm]
  round 2.5 hole 1.2: 1(5.8,0) 2(-5.8,0)
  silkscreen extent -5,-5 5,5, body extent -6.35,-3.98 6.35,4.02, height 8
PBD-16 [mm] "Разъем на плату"
  rect 1.5x1.5 hole 1: 1(0,0)
  round 1.5 hole 1: 2(0,-2.54) 3(-2.54,0) 4(-2.54,-2.54) 5(-5.08,0) 6(-5.08,-2.54) 7(-7.62,0) 8(-7.62,-2.54) 9(-10.16,0) 10(-10.16,-2.54) 11(-12.7,0) 12(-12.7,-2.54) 13(-15.24,0) 14(-15.24,-2.54) 15(-17.78,0) 16(-17.78,-2.54)
  silkscreen extent -19.05,-3.81 2.55,1.2, body extent -19.05,-3.81 1.27,1.27, height 8.5
PBD-20 [mm] "Разъем на плату"
  rect 1.5x1.5 hole 1: 1(0,0)
  round 1.5 hole 1: 2(0,-2.54) 3(-2.54,0) 4(-2.54,-2.54) 5(-5.08,0) 6(-5.08,-2.54) 7(-7.62,0) 8(-7.62,-2.54) 9(-10.16,0) 10(-10.16,-2.54) 11(-12.7,0) 12(-12.7,-2.54) 13(-15.24,0) 14(-15.24,-2.54) 15(-17.78,0) 16(-17.78,-2.54) 17(-20.32,0) 18(-20.32,-2.54) 19(-22.86,0) 20(-22.86,-2.54)
  silkscreen extent -24.13,-3.81 2.55,1.2, body extent -24.13,-3.81 1.27,1.27, height 8.5
PBD-30 [mm] "Разъем на плату"
  rect 1.5x1.5 hole 1: 1(0,0)
  round 1.5 hole 1: 2(0,-2.54) 3(-2.54,0) 4(-2.54,-2.54) 5(-5.08,0) 6(-5.08,-2.54) 7(-7.62,0) 8(-7.62,-2.54) 9(-10.16,0) 10(-10.16,-2.54) 11(-12.7,0) 12(-12.7,-2.54) 13(-15.24,0) 14(-15.24,-2.54) 15(-17.78,0) 16(-17.78,-2.54) 17(-20.32,0) 18(-20.32,-2.54) 19(-22.86,0) 20(-22.86,-2.54) 21(-25.4,0) 22(-25.4,-2.54) 23(-27.94,0) 24(-27.94,-2.54) 25(-30.48,0) 26(-30.48,-2.54) 27(-33.02,0) 28(-33.02,-2.54) 29(-35.56,0) 30(-35.56,-2.54)
  silkscreen extent -36.83,-3.81 2.55,1.2, body extent -36.83,-3.81 1.27,1.27, height 8.5
PBD-34 [mm] "Разъем на плату"
  rect 1.5x1.5 hole 1: 1(0,0)
  round 1.5 hole 1: 2(0,-2.54) 3(-2.54,0) 4(-2.54,-2.54) 5(-5.08,0) 6(-5.08,-2.54) 7(-7.62,0) 8(-7.62,-2.54) 9(-10.16,0) 10(-10.16,-2.54) 11(-12.7,0) 12(-12.7,-2.54) 13(-15.24,0) 14(-15.24,-2.54) 15(-17.78,0) 16(-17.78,-2.54) 17(-20.32,0) 18(-20.32,-2.54) 19(-22.86,0) 20(-22.86,-2.54) 21(-25.4,0) 22(-25.4,-2.54) 23(-27.94,0) 24(-27.94,-2.54) 25(-30.48,0) 26(-30.48,-2.54) 27(-33.02,0) 28(-33.02,-2.54) 29(-35.56,0) 30(-35.56,-2.54) 31(-38.1,0) 32(-38.1,-2.54) 33(-40.64,0) 34(-40.64,-2.54)
  silkscreen extent -41.91,-3.81 2.55,1.2, body extent -41.91,-3.81 1.27,1.27, height 8.5
PBS-7 [mm] "Разъем на плату"
  rect 1.5x2 hole 1: 1(0,0)
  oval 1.5x2 hole 1: 2(-2.54,0) 3(-5.08,0) 4(-7.62,0) 5(-10.16,0) 6(-12.7,0) 7(-15.24,0)
  silkscreen extent -16.51,-1.2 2.55,1.2, body extent -16.51,-1.27 1.27,1.27, height 8.5
PBS-10 [mm] "Разъем на плату"
  rect 1.5x2 hole 1: 1(0,0)
  oval 1.5x2 hole 1: 2(-2.54,0) 3(-5.08,0) 4(-7.62,0) 5(-10.16,0) 6(-12.7,0) 7(-15.24,0) 8(-17.78,0) 9(-20.32,0) 10(-22.86,0)
  silkscreen extent -24.13,-1.2 2.55,1.2, body extent -24.13,-1.27 1.27,1.27, height 8.5
PG-TDSON-8 [mm]
  rect 0.5x0.85 smd paste-0.05: 1(-1.905,-2.9) 2(-0.635,-2.9) 3(0.635,-2.9) 4(1.905,-2.9)
  rect 0.6x0.85 smd paste-0.05: 5(1.905,2.9) 6(0.635,2.9) 7(-0.635,2.9) 8(-1.905,2.9)
  rect 0.1x0.1 smd paste-1 mask-1: 9(-0.1,0)
  Top Layer region: -2.205,3.325 2.205,3.325 2.205,-1.225 -2.205,-1.225
  silkscreen extent -2.88,-3.03 -2.63,-2.78, body extent -2.68,-3.08 2.67,3.07, height 1
PLD-8 [mm] "Разъем на плату"
  rect 1.5x1.5 hole 1: 1(0,0)
  round 1.5 hole 1: 2(0,-2.54) 3(-2.54,0) 4(-2.54,-2.54) 5(-5.08,0) 6(-5.08,-2.54) 7(-7.62,0) 8(-7.62,-2.54)
  silkscreen extent -8.9,-3.81 2.55,1.2, body extent -8.89,-3.81 1.27,1.27, height 8.6
PLD-44 [mm] "Разъем на плату"
  rect 1.5x2 hole 1: 1(0,0)
  oval 1.5x2 hole 1: 2(0,-2.54) 3(-2.54,0) 4(-2.54,-2.54) 5(-5.08,0) 6(-5.08,-2.54) 7(-7.62,0) 8(-7.62,-2.54) 9(-10.16,0) 10(-10.16,-2.54) 11(-12.7,0) 12(-12.7,-2.54) 13(-15.24,0) 14(-15.24,-2.54) 15(-17.78,0) 16(-17.78,-2.54) 17(-20.32,0) 18(-20.32,-2.54) 19(-22.86,0) 20(-22.86,-2.54) 21(-25.4,0) 22(-25.4,-2.54) 23(-27.94,0) 24(-27.94,-2.54) 25(-30.48,0) 26(-30.48,-2.54) 27(-33.02,0) 28(-33.02,-2.54) 29(-35.56,0) 30(-35.56,-2.54) 31(-38.1,0) 32(-38.1,-2.54) 33(-40.64,0) 34(-40.64,-2.54) 35(-43.18,0) 36(-43.18,-2.54) 37(-45.72,0) 38(-45.72,-2.54) 39(-48.26,0) 40(-48.26,-2.54) 41(-50.8,0) 42(-50.8,-2.54) 43(-53.34,0) 44(-53.34,-2.54)
  silkscreen extent -54.61,-3.81 2.55,1.2, body extent -54.61,-3.81 1.27,1.27, height 9.6
PSON80P400X80_HS-9N [mm]
  rect 0.55x0.4 smd: 1(-1.785,1.2) 2(-1.785,0.4) 3(-1.785,-0.4) 4(-1.785,-1.2) 5(1.785,-1.2) 6(1.785,-0.4) 7(1.785,0.4) 8(1.785,1.2)
  rect 2.6x3 smd paste-1.3: 9(0,0)
  silkscreen extent -2.65,-2.2 2.2,2.25, body extent -2.05,-2.05 2.05,2.05, height 0.8
PTH08080W [mm]
  oval 3x2 hole 1.4: 1(0,0) 2(0,-3.6) 3(0,-7.2) 4(12.2,-8.4) 5(12.2,1.2)
  silkscreen extent -2.1,-10.5 14.2,3.2, body extent -1.44,-10.05 13.8,2.65, height 8.3
R1608-0603 [mm] "Chip Resistor; Body 1.6 x 0.8 mm (LxW typ)"
  rrect15% 0.9x1.1 smd paste-0.05 mask+0.05: 1(-0.825,0) 2(0.825,0)
  silkscreen extent -1.43,-0.7 1.43,0.7, body extent -0.8,-0.4 0.8,0.4, height 0.45
SMB_H [mm]
  rect 3x3 smd: 1(-2.7,0) 2(2.7,0)
  silkscreen extent -2.29,-1.9 2.29,1.9, body extent -2.8,-1.9 2.8,1.9, height 2.4
SMCJ [mm] "DO-214-AB/SMC; 2 C-Bend Leads; Body 7.9 x 5.9 mm, inc. leads (LxW)"
  rect 2.4x3.3 smd: 1(-3.475,0) 2(3.475,0)
  silkscreen extent -5.07,-3.1 4.97,3.2, body extent -3.89,-3.1 4.16,3.15, height 2.89
SMCJ_CA [mm] "DO-214-AB/SMC; 2 C-Bend Leads; Body 7.9 x 5.9 mm, inc. leads (LxW)"
  rect 2.4x3.3 smd: 1(-3.475,0) 2(3.475,0)
  silkscreen extent -5.07,-3.1 4.97,3.2, body extent -3.89,-3.1 4.16,3.15, height 2.89
SO8_N [mm] "SOIC, 8-Leads, Body 4.9x3.9mm, Pitch 1.27mm, IPC Medium Density"
  oval 2.2x0.6 smd: 1(-2.4,1.905) 2(-2.4,0.635) 3(-2.4,-0.635) 4(-2.4,-1.905) 5(2.4,-1.905) 6(2.4,-0.635) 7(2.4,0.635) 8(2.4,1.905)
  silkscreen extent -2.52,-2.5 0.9,2.88, body extent -3,-2.54 3,2.54, height 1.7
SO16_WIDE(300mil)_13x10_H [mm]
  rect 2.5x0.85 smd: 1(-4.71,4.445) 2(-4.71,3.175) 3(-4.71,1.905) 4(-4.71,0.635) 5(-4.71,-0.635) 6(-4.71,-1.905) 7(-4.71,-3.175) 8(-4.71,-4.445) 9(4.71,-4.445) 10(4.71,-3.175) 11(4.71,-1.905) 12(4.71,-0.635) 13(4.71,0.635) 14(4.71,1.905) 15(4.71,3.175) 16(4.71,4.445)
  silkscreen extent -4.75,-6.5 3.8,6.5, body extent -5.15,-5.1 5.15,5.1, height 3.5
SODFL370X140-2N [mm]
  rect 1.25x1.2 smd: 1(-1.525,0) 2(1.525,0)
  silkscreen extent -2.1,-1 1.5,1.05, body extent -1.85,-1 1.85,1, height 1.4
SOLDER-BRIDGE_R0603-0R [mil]
  round 10 smd paste-393.7 mask+4: 1(-19.69,0) 2(23.62,0)
  Top Layer region: -1.69,19.68 18,0 -1.69,-19.69 47.24,-19.69 47.24,19.68
  Top Layer region: -47.24,-19.69 -47.24,19.68 -15.75,19.68 3.94,0 -15.75,-19.69 -47.24,-19.69
  silkscreen extent -50,-23 50,23, body extent -36,-20 36,20, height 20
TBU_CA [mm]
  rect 1.85x3.05 smd: 0(-2.05,0) 1(1.95,0)
  silkscreen extent -3.3,-2 3.2,2, body extent -3.25,-2 3.25,2, height 1.1

## Part data
C1 C2: library part "ECAP SMD", "Конденсатор электролитический алюминиевый SMD 8x10.5мм", Вид монтажа=SMD, Диэлектрик=Электролит, Название="ECAP SMD", Напряжение=25B, Номинал=220uF, Производитель="JB Capacitors", Температурный диапазон="-40 ~ 105", Тип элемента="Конденсатор электролитический"
C3_1 C3_2 C4_1 C4_2 C5_1 C5_2 C6_1 C6_2 C7_1 C7_2 C8_1 C8_2 C9_1 C9_2 C10_1 C10_2 C11_1 C11_2 C12_1 C12_2 C13_1 C13_2 C14_1 C14_2 C15_1 C15_2 C16_1 C16_2 C17_1 C17_2 C18_1 C18_2 C19_1 C19_2 C20_1 C20_2 C21_1 C21_2: library part Cap, "Керамическийконденсатор", Вид монтажа=SMD, Диэлектрик=X5R, Корпус="0603 (1608 Metric)", Напряжение=16B, Температурный диапазон="-55 ~ 100", Тип элемента="Керамический конденсатор"
  C3_1 C3_2 C5_1 C5_2 C7_1 C7_2 C9_1 C9_2 C11_1 C11_2 C13_1 C13_2 C15_1 C15_2 C17_1 C17_2 C19_1 C19_2: Номинал=0.1uF
  C4_1 C4_2 C6_1 C6_2 C8_1 C8_2 C10_1 C10_2 C12_1 C12_2 C14_1 C14_2 C16_1 C16_2 C18_1 C18_2: Номинал=4.7uF
  C20_1 C20_2: Номинал=1uF
  C21_1 C21_2: Номинал=10uF
D1 D2 D4 D24_1 D24_2: "Диод Шоттки 60В 5А [SMC]", Артикул=STPS5L60S, Вид монтажа=SMD, Корпус=do-214ab/smc, Название=STPS5L60S, Напряжение=60В, Производитель=STMicroelectronics, Тип элемента="Диод шоттки"
D3: library part SMCJ_CА, "Супрессор двунаправленный", ComponentLink=http://www.digikey.com/product-detail/en/SMBJ5.0CA/SMBJ5.0CABTR-ND/2254207, Артикул=SMCJ15CA, Вид монтажа=SMD, Корпус="DO-214AB, SMC", Название=SMCJ15CA, Номинал=15В, Производитель="ST MICROELECTRONICS CO., LTD.", Температурный диапазон="-55°C ~ 150°C", Тип элемента="Защитный диод"
D5_1 D5_2 D6_1 D6_2 D7_1 D7_2 D8_1 D8_2 D9_1 D9_2 D10_1 D10_2 D11_1 D11_2 D12_1 D12_2 D13_1 D13_2 D14_1 D14_2 D15_1 D15_2 D16_1 D16_2 D17_1 D17_2 D18_1 D18_2 D19_1 D19_2 D20_1 D20_2 D21_1 D21_2 D22_1 D22_2 D23_1 D23_2: library part SMBJ_CА, "Супрессор двунаправленный", ComponentLink=http://www.digikey.com/product-detail/en/SMBJ5.0CA/SMBJ5.0CABTR-ND/2254207, Артикул=SMBJ5.0CA, Вид монтажа=SMD, Корпус="DO-214AA, SMB", Название=SMBJ5.0CA, Номинал=5В, Производитель="ST MICROELECTRONICS CO., LTD.", Температурный диапазон="-55°C ~ 150°C", Тип элемента="Защитный диод"
D25_1 D25_2: "Диод Шоттки 100В 1А", Артикул=SKL110, Вид монтажа=SMD, Корпус=do-214ab/smc, Название=SKL110, Напряжение=100В, Производитель=STMicroelectronics, Тип элемента="Диод шоттки"
F1 F2 F3: "Держатель предохранителя 5x20 с крышкой", Артикул=FH-101C, Вид монтажа=DIP, Корпус=5x20, Название=FH-101C, Производитель="Dragon City Industries", Температурный диапазон=-40…85, Тип элемента="держатель предохранителя"
  F1 F2: Номинал=5А
  F3: Номинал=0.75А
F4_1 F4_2 F5_1 F5_2 F6_1 F6_2 F7_1 F7_2 F8_1 F8_2 F9_1 F9_2 F10_1 F10_2 F11_1 F11_2 F12_1 F12_2 F13_1 F13_2 F14_1 F14_2 F15_1 F15_2: library part TBU-CA, "Самовосстанавливающийся предохранитель", Артикул=TBU-CA065-200-WH, Вид монтажа=SMD, Корпус=DFN, Название=TBU-CA065-200-WH, Номинал=0.4A, Производитель=Bourns, Температурный диапазон="-40 to +125 °C", Тип элемента="Самовосстанавливающийся предохранитель"
FU1_1 FU1_2 FU2_1 FU2_2: "PTC Resettable Fuses", Артикул=MF-MSMF030, Вид монтажа=SMD, Корпус=1812, Название=MF-MSMF030, Напряжение=13.2В, Номинал=0.3А, Производитель=Bourns, Температурный диапазон=-40…85, Тип элемента="Самовосстанавливающийся предохранитель"
FV1_1 FV1_2 FV2_1 FV2_2: library part NS2R-xxx-x_1, "Газовый разрядник двухэлектродный", Артикул=NS2R-75A1-M, Название=NS2R-75A1-M, Напряжение=75В, Номинал=75В, Тип элемента="разрядник двухэлектродный"
IC1_1 IC1_2: library part ADM4852, "RS-485 Трансивер", Артикул=ADM4852arz, Вид монтажа=SMD, Корпус=SOIC8, Название=ADM4852arz, Производитель="Analog Devices", Температурный диапазон="-40°C ~ 85°C", Тип элемента="Драйвер интерфейса RS-485"
IC2_1 IC2_2 IC4_1 IC4_2 IC5_1 IC5_2: library part ADM4857, "RS-485 Трансивер", Артикул=ADM4857arz, Вид монтажа=SMD, Корпус=SOIC8, Название=ADM4857arz, Производитель="Analog Devices", Температурный диапазон="-40°C ~ 85°C", Тип элемента="Драйвер интерфейса RS-485"
IC3_1 IC3_2: "RS-485 Трансивер изолированный", Артикул=ADM2687E, Вид монтажа=SMD, Корпус=SOIC16, Название=ADM2687E, Производитель="Analog Devices", Температурный диапазон="-40°C ~ 85°C", Тип элемента="Драйвер интерфейса RS-485, RS-422"
IC6_1 IC6_2: "Драйвер MOSFET", Артикул=LM5109BSD/NOPB, Вид монтажа=SMD, Название=LM5109BSD/NOPB, Номинал=108V/1A, Температурный диапазон="-40 to +125 °C", Тип элемента=Микросхема
LD1 LD2 LD3 LD4: "Светодиод красный 3мм", Артикул=GNL-3012ED, Вид монтажа=DIP, Название=GNL-3012ED, Производитель=STMicroelectronics, Тип элемента=Светодиод
P1 P2 P3 P4 P5 P7_1 P7_2 P9_1 P9_2 P14_1 P14_2 P15_1 P15_2 P16_1 P16_2: "Разъем штыревой на плату (папа)", Вид монтажа=DIP, Напряжение=300В, Тип элемента=Разъем
  P1: Артикул=PLD-8, Название=PLD-8, Номинал=1А, Примечание="шаг 2.54 мм", Производитель="Connfly electronic (Zhenqin)", Температурный диапазон=-55…140
  P2 P3 P4: Артикул=2EDGR-5.0-02P, Название=2EDGR-5.0-02P, Номинал=10А, Примечание="шаг 5 мм", Производитель=Degson, Температурный диапазон=-40℃~105℃
  P5 P9_1 P9_2: Артикул=15EDGRC-3.81-02, Название=15EDGRC-3.81-02, Номинал=8А, Примечание="шаг 3.81 мм", Производитель=Degson, Температурный диапазон=-40℃~105℃
  P7_1 P7_2: Артикул=15EDGRC-3.5-06P-14, Название=15EDGRC-3.5-06P-14, Номинал=8А, Примечание="шаг 3.5 мм", Производитель=Degson, Температурный диапазон=-40℃~105℃
  P14_1 P14_2 P15_1 P15_2 P16_1 P16_2: Артикул=PLD-44, Название=PLD-44, Номинал=1А, Примечание="шаг 2.54 мм", Производитель="Connfly electronic (Zhenqin)", Температурный диапазон=-55…140
P6_1 P6_2 P8_1 P8_2: "Разъем штыревой на плату", Вид монтажа=DIP, Напряжение=300В, Номинал=1А, Примечание="шаг 2.54 мм", Производитель="Connfly electronic (Zhenqin)", Температурный диапазон=-55…140, Тип элемента=Разъем
  P6_1 P6_2: Артикул=BH-10, Название=BH-10
  P8_1 P8_2: Артикул=BH-08, Название=BH-08
P10 P11 P12 P13 P17_1 P17_2 P18_1 P18_2: "Гнездо на плату", Вид монтажа=DIP, Напряжение=300В, Номинал=1А, Примечание="шаг 2.54 мм", Производитель="Connfly electronic (Zhenqin)", Температурный диапазон=-55…140, Тип элемента=Разъем
  P10: Артикул=PBD-16, Название=PBD-16
  P11: Артикул=PBD-20, Название=PBD-20
  P12: Артикул=PBD-34, Название=PBD-34
  P13: Артикул=PBD-30, Название=PBD-30
  P17_1 P17_2: Артикул=PBS-10, Название=PBS-10
  P18_1 P18_2: Артикул=PBS-7, Название=PBS-7
Q1_1 Q1_2: "N - канальный MOSFET", Артикул=BSC030N08NS5ATMA1, Вид монтажа=SMD, Название=BSC030N08NS5ATMA1, Номинал=80V/100A, Температурный диапазон="-40 to +125 °C", Тип элемента="Полевой транзистор"
R1 R2 R3 R4 R5 R6 R7_1 R7_2 R8_1 R8_2 R9_1 R9_2 R10_1 R10_2 R11_1 R11_2 R12_1 R12_2 R13_1 R13_2 R14_1 R14_2 R15_1 R15_2 R16_1 R16_2 R17_1 R17_2 R18_1 R18_2 R19_1 R19_2: library part resistor, "SMD резистор", Вид монтажа=SMD, Корпус="0603 (1608 Metric)", Название=Резистор, Производитель=1%, Тип элемента=Резистор, Точность=1%
  R1 R2: Номинал=7.2к
  R3: Номинал=2.4к
  R4: Номинал=330
  R5: Номинал=1к
  R6: Номинал=18
  R7_1 R7_2 R8_1 R8_2: Номинал=60R
  R9_1 R9_2 R12_1 R12_2 R13_1 R13_2 R14_1 R14_2 R15_1 R15_2: Номинал=120R
  R10_1 R10_2 R18_1 R18_2 R19_1 R19_2: Номинал=10k
  R11_1 R11_2: Номинал=1k
  R16_1 R16_2 R17_1 R17_2: Номинал=2.2R
SB1_1 SB1_2 SB2_1 SB2_2 SB3_1 SB3_2 SB4_1 SB4_2 SB5_1 SB5_2: library part SB, "Перемычка"
U1: "DC/DC преобразователь", ComponentLink=http://www.digikey.com/product-detail/en/AD22100STZ/AD22100STZ-ND/936657, Артикул=PTH08080W, Вид монтажа=DIP, Название=PTH08080W, Напряжение=18/0.9-5.5В, Номинал=2.25А, Производитель="Texas Instruments", Температурный диапазон="-40°C ~ 85°C", Тип элемента="Модуль питания"

## Free pads (board coordinates)
  round 3.2 hole 3.2 unplated: 0(100.74,138.91) 0(102.01,62.71) 0(133.76,86.84) 0(147.73,62.71) 0(149,137.64)

## Via types
v1: diameter 0.6, hole 0.3, Top Layer to Bottom Layer, 60 vias
v2: diameter 0.7, hole 0.3, Top Layer to Bottom Layer, 10 vias
v3: diameter 1.27, hole 0.711, Top Layer to Bottom Layer, 2 vias

## Nets (pads, with @x,y where several pads share a name; then routed paths per layer and width w, separated by ;. In a path a pad name is that pad's centre, name@x,y a point inside that pad or via, vN(x,y) a via of type N, cw(c..) or ccw(c..) an arc to the next point about the centre after c; other vN are vias at no path point)
3V3: C8_1.1 C8_2.1 C9_1.1 C9_2.1 C12_1.2 C12_2.2 C13_1.2 C13_2.2 IC3_1.2 IC3_1.5 IC3_1.7 IC3_2.2 IC3_2.5 IC3_2.7 P10.5 | length 104.6
  Top Layer w0.75: v1(119.25,83.25) v1(130.75,83.25)
  Bottom Layer w0.5: P10.5@100.74,119.86 101.94,118.66 104.09,118.66 112.75,110 C12_2.2@112.75,82
  Bottom Layer w0.75: C12_2.2@112.75,82 C13_2.2@112.75,80 112.825,79.925 IC3_1.2@112.825,76.71 112.875,76.66 112.875,75.375 114.25,74 116.75,74 ; IC3_1.5@116.635,76.71 116.635,74.115 116.75,74 ; v1(119.25,83.25) 119.213,83.213 119.213,82.037 C9_2.1@119.175,82 IC3_1.7@119.175,76.71 119.125,76.66 119.125,75.375 117.75,74 116.75,74 ; v1(130.75,83.25) C8_1.1@130.75,82 C9_1.1@130.75,80 130.75,79.718 130.825,79.643 IC3_2.2@130.825,76.71 130.875,76.66 130.875,75.442 132.067,74.25 134.75,74.25 ; IC3_2.5@134.635,76.71 134.635,74.365 134.75,74.25 ; C12_1.2@137.175,82 IC3_2.7@137.175,76.71 137.125,76.66 137.125,75.375 136,74.25 134.75,74.25
36V_AZ: D2.1 D24_1.1 F1.2 P2.2 P9_1.2 R1.2 | length 380.8
  Top Layer w3: P9_1.2@8.127,20.1 12.357,20.1 12.6,19.857 ; P2.2@34.5,160 12.6,138.1 12.6,19.857 ; F1.2@204.5,37 199.2,42.3 185.7,42.3 180,36.6 123.6,36.6 120.1,40.1 79.6,40.1 57.6,18.1 14.357,18.1 12.6,19.857
  Bottom Layer w0.25: R1.2@199.825,41 199.825,40.9 200.15,40.575 201.452,40.575 204.5,37.526 F1.2@204.5,37
  Bottom Layer w2: P9_1.2@8.127,20.1 8.762,20.1 10.337,18.525 D24_1.1@15,18.525
  Bottom Layer w3: F1.2@204.5,37 D2.1@209.525,37
36V_EL: D1.1 D24_2.1 F2.2 P4.2 P9_2.2 R2.2 | length 142.7
  Top Layer w3: F2.2@204.5,51 216.329,51 221.829,56.5 237.2,56.5 239,54.7 239.4,54.3 P9_2.2@239.9,53.8 ; P4.2@238,135.5 238.096,135.404 240.096,135.404 242.75,132.75 242.75,128 238.5,123.75 238.5,56.5
  Bottom Layer w0.25: R2.2@199.825,45.75 199.825,45.85 203.641,49.665 203.692,49.665 204.5,50.474 F2.2@204.5,51
  Bottom Layer w2: D24_2.1@233,56.475 237.225,56.475 239.304,54.396 239.304,54.031 239.535,53.8 P9_2.2@239.9,53.8
  Bottom Layer w3: F2.2@204.5,51 D1.1@209.1,51
+5: C2.1 C4_1.2 C4_2.2 C5_1.2 C5_2.2 C6_1.2 C6_2.2 C7_1.2 C7_2.2 C16_1.2 C16_2.2 C17_1.2 C17_2.2 C18_1.2 C18_2.2 C19_1.2 C19_2.2 FU1_1.2 FU1_2.2 FU2_1.2 FU2_2.2 IC1_1.2 IC1_1.8 IC1_2.2 IC1_2.8 IC2_1.1 IC2_2.1 IC4_1.1 IC4_2.1 IC5_1.1 IC5_2.1 P10.7 P14_1.42 P14_2.42 P15_1.42 P15_2.42 P16_1.42 P16_2.42 P17_1.5 P17_1.10 P17_2.5 P17_2.10 R5.2 R7_1.1 R7_2.1 R10_1.1 R10_2.1 U1.3 | length 707.6
  Top Layer w0.25: C2.1@169,47.5 169,48.5 169.875,49.375 170,49.375 171.125,50.5 181.5,50.5 v1(186,46)
  Top Layer w0.5: P16_1.42@50.27,103.27 50.02,103.27 48.82,102.07 47.123,102.07 46.28,101.227 46.28,87.72 50.62,83.38 66.63,83.38 ; v1(91.75,90.519) 91.777,90.519 91.838,90.58 103.637,90.58 106.481,93.424 106.481,94.231 v1(106.5,94.25) ; P10.7@100.74,117.32 101.94,118.52 104.12,118.52 110.2,124.6 v1(143.3,124.6) ; P16_2.42@229.53,122.27 229.53,122.02 230.73,120.82 230.73,110.627 229.63,109.527 P15_2.42@229.63,109.277
  Top Layer w1: v3(212.5,59.75) v3(213.75,59.75) 230.483,59.75 235.24,64.506 P17_2.10@235.24,75.07
  Top Layer w2: P14_1.42@66.63,36.277 66.63,39.46 P17_1.10@72.24,45.07 75.07,45.07 81.5,51.5 ; P15_1.42@66.63,79.277 66.63,83.38 68.25,85 91.25,85 ; P17_1.5@72.24,57.77 75.23,57.77 81.5,51.5 ; v1@91.25,109.7 91.25,85 ; 91.25,110 98.57,117.32 P10.7@100.74,117.32 ; C2.1@169,47.5 169,45.3 171.8,42.5 U1.3@171.8,42 129.5,42 120,51.5 91.25,51.5 ; P16_2.42@229.53,122.27 229.53,123.366 230.664,124.5 232.848,124.5 234.25,123.098 234.25,103 229.63,98.38 229.63,87.9 ; P14_2.42@229.63,66.277 229.63,75.07 ; P17_2.10@235.24,75.07 229.63,75.07 ; P17_2.5@235.24,87.77 229.63,87.77 229.63,75.07 ; 81.5,51.5 91.25,51.5 ; 91.25,51.5 91.25,85
  Bottom Layer w0.25: v1(186,46) 186.925,46 R5.2@187.175,45.75
  Bottom Layer w0.5: FU1_1.2@59.8,141.2 FU1_2.2@59.8,135.5 59.8,134.85 60.4,134.25 62.864,134.25 71.114,126 78.9,126 v1(92.9,112) ; C16_1.2@62.075,54.5 63.207,54.5 ; C17_1.2@62.25,64 C18_1.2@64.925,64 64.925,61.451 IC5_1.1@64.971,61.405 ; IC4_1.1@65.15,52.405 64.971,52.405 64.925,52.451 C19_1.2@64.925,54.5 ; IC5_1.1@65.15,61.405 IC5_1.1@64.971,61.405 ; FU2_1.2@70.2,116 84.8,116 v1(91.1,109.7) ; P17_1.5@72.24,57.77 68.095,57.77 64.925,54.6 C19_1.2@64.925,54.5 ; FU2_2.2@84.9,100.25 90.75,100.25 v1(90.8,100.3) ; v1(91.75,90.519) 91.769,90.538 92.013,90.538 92.9,91.425 R10_2.1@93,91.425 ; v1(106.5,94.25) R10_1.1@106.5,96.675 ; IC2_2.1@113.905,120.6 113.905,121.373 113.951,121.419 113.994,121.419 116.15,123.575 C7_2.2@116.25,123.575 ; C7_2.2@116.25,123.575 v1(116.25,124.625) C6_2.2@116.25,125.675 ; IC1_2.2@121.635,120.6 121.635,121.4 123.81,123.575 C5_2.2@125.25,123.575 v1(125.25,124.625) C4_2.2@125.25,125.675 ; R7_2.1@122.575,129.25 122.575,126.543 122.905,126.213 IC1_2.8@122.905,125.629 ; IC1_2.8@122.905,125.4 IC1_2.8@122.905,125.629 ; C4_2.2@125.25,125.675 122.951,125.675 IC1_2.8@122.905,125.629 ; IC2_1.1@132.655,120.6 132.674,120.619 132.674,121.599 134.65,123.575 C7_1.2@134.75,123.575 134.8,123.625 134.8,124.6 v1(134.75,124.65) C6_1.2@134.75,125.675 ; IC1_1.2@139.635,120.6 139.635,121.4 141.81,123.575 C5_1.2@143.25,123.575 143.281,123.606 143.281,124.581 v1(143.3,124.6) 143.3,124.627 143.25,124.677 143.25,125.176 143.026,125.4 IC1_1.8@140.905,125.4 140.905,128.82 140.575,129.15 R7_1.1@140.575,129.25 ; C19_2.2@221.825,90.25 224,90.25 ; C17_2.2@221.825,99.75 223.4,99.75 ; C18_2.2@224.675,90.25 224,90.25 ; C16_2.2@224.675,99.75 223.4,99.75 ; v1(229.3,87.9) 229.295,87.905 IC4_2.1@223.9,87.905 223.9,90.15 224,90.25 ; v1(229.4,96.9) 229.395,96.905 IC5_2.1@223.9,96.905 223.446,96.905 223.4,96.951 223.4,99.75 ; C19_1.2@64.925,54.5 63.207,54.5 63.5,54.793 63.5,60.555 64.35,61.405 IC5_1.1@64.971,61.405
  Bottom Layer w1: U1.3@171.8,42.5 189.05,59.75 v3(212.5,59.75) v3(213.75,59.75)
  Bottom Layer w2: U1.3@171.8,42 U1.3@171.8,42.5
+12: C1.1 C20_1.1 C20_2.1 D3.2 D4.1 F3.2 IC6_1.1 IC6_2.1 R3.2 R16_1.1 R16_2.1 U1.1 | length 259.8
  Top Layer w1: v1(229.75,30.25) 233,27 v1(238.75,27)